# EAGLE board xmas (EAGLE 8.3.2)
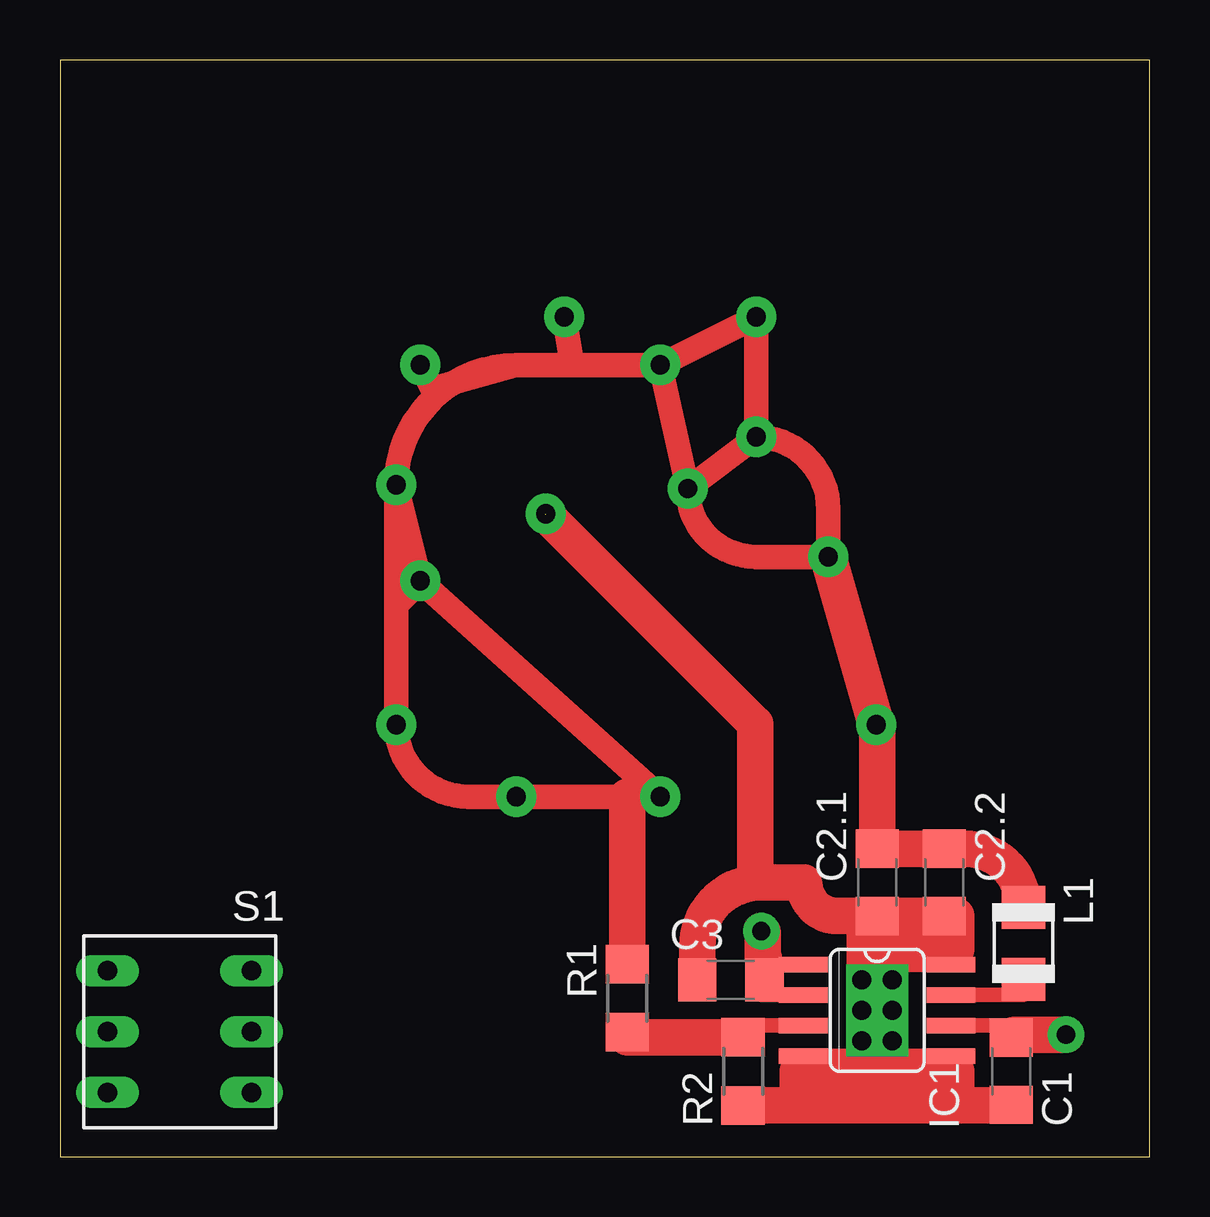
[diagram p0: board, top side]
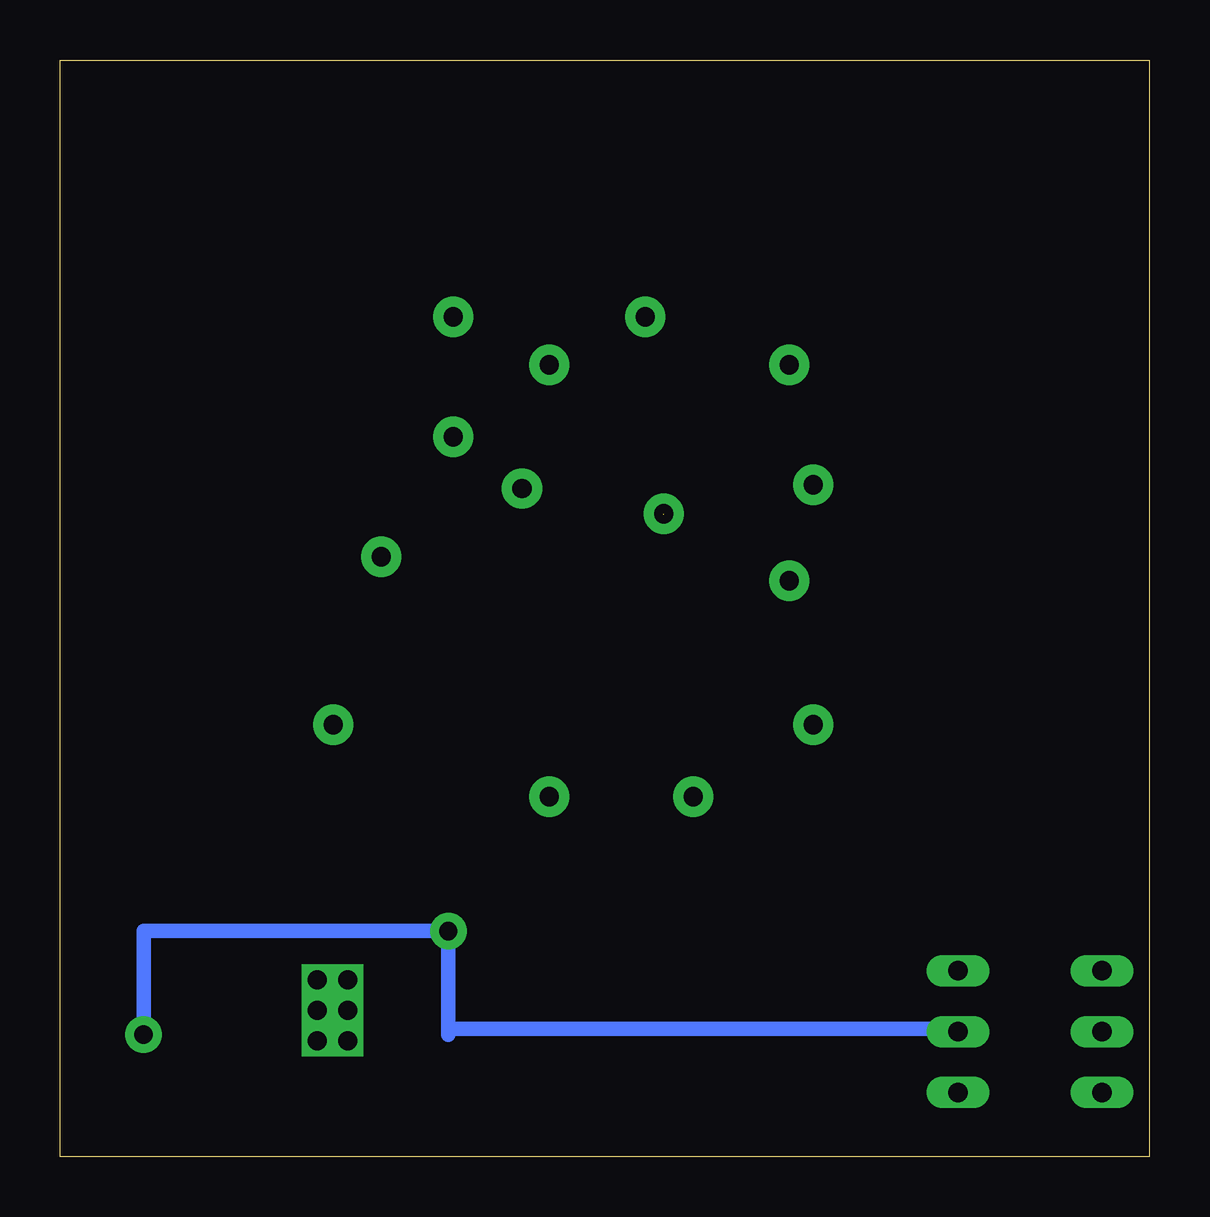
[diagram p1: board, bottom side, seen from below]

Size 45.39 x 45.71 mm. Coordinates in mm from the lower left corner, seen from the top.
Outline: 0,0 45.39,0 45.39,45.71 0,45.71 0,0
Copper layers (1*16): Top 0.035mm / dielectric 1.5mm / Bottom 0.035mm
Design rules "default": minimum track width 10mil, minimum drill 24mil, track to track 8mil, track to pad 8mil, pad to pad 8mil, via to via 8mil, smd to smd 8mil, copper to edge 40mil, drill to drill 8mil, minimum pad ring 10mil, minimum via ring 8mil, stop-mask expansion 4mil, vias tented up to drill 0mil, thermal gap 10mil

## Footprints (pad centres in the part's own frame; a part is rotated, then mirrored left to right if it is on the bottom)
C1206 = smd 1.6 x 1.8: 1 -1.4,0; 2 1.4,0
HSOP8 = smd 0.66 x 2.032: 1 -1.905,-3.073; 2 -0.635,-3.073; 3 0.635,-3.073; 4 1.905,-3.073; 5 1.905,3.073; 6 0.635,3.073; 7 -0.635,3.073; 8 -1.905,3.073 | drill 0.8 square: H@1 -1.27,-0.635; H@2 0,-0.635; H@3 1.27,-0.635; H@4 1.27,0.635; H@5 0,0.635; H@6 -1.27,0.635
L1210W = smd 1.8 x 1.8: 1 -1.499,0; 2 1.499,0
LSP08 = drill 0.8 pad 1.676: P$1 0,0
R1206 = smd 1.6 x 1.803: 1 -1.422,0; 2 1.422,0
9077-2 = drill 0.813 long: 1 -2.54,3; 2 0,3; 3 2.54,3; 4 -2.54,-3; 5 0,-3; 6 2.54,-3

## Placement (x,y rotation side)
C1  10μ  [C1206]  39.62,3.56 270 top
C2.1  22μ  [C1206]  34.04,11.43 270 top
C2.2  22μ  [C1206]  36.83,11.43 270 top
C3  0.1μ  [C1206]  27.94,7.37 180 top
IC1  ST1S10PHR  [HSOP8]  34.04,6.1 270 top
L1  2.2μ  [L1210W]  40.13,8.89 90 top
P1  LSP08  [LSP08]  14,18 0 top
P2  LSP08  [LSP08]  34,18 0 top
P3  LSP08  [LSP08]  14,28 0 top
P4  LSP08  [LSP08]  15,24 0 top
P5  LSP08  [LSP08]  25,15 0 top
P6  LSP08  [LSP08]  19,15 0 top
P7  LSP08  [LSP08]  29,35 0 top
P8  LSP08  [LSP08]  26.14,27.84 0 top
P9  LSP08  [LSP08]  25,33 0 top
P10  LSP08  [LSP08]  29,30 0 top
P11  LSP08  [LSP08]  21,35 0 top
P12  LSP08  [LSP08]  32,25 0 top
P13  LSP08  [LSP08]  15,33 0 top
PGND  LSP08  [LSP08]  20.23,26.79 0 top
R1  33k  [R1206]  23.62,6.6 90 top
R2  22k  [R1206]  28.45,3.56 90 top
S1  [9077-2]  4.97,5.21 270 top

## Library data of the parts
C1 C2.1 C2.2 C3 R1 R2 = resistor
IC1 = vreg-pulse
L1 = murata
P1-P13 PGND S1 = Gumix

## Nets
2.0V: C2.1.1 C2.2.1 L1.2 P1.P$1 P2.P$1 P3.P$1 P4.P$1 P5.P$1 P6.P$1 P7.P$1 P8.P$1 P9.P$1 P10.P$1 P11.P$1 P12.P$1 P13.P$1 R1.2
GND: C1.2 C2.1.2 C2.2.2 C3.2 IC1.4 IC1.5 IC1.8 IC1.H@1 PGND.P$1 R2.1
N$2: IC1.7 L1.1
N$3: IC1.3 R1.1 R2.2
V+: S1.3
V_IN: C1.1 C3.1 IC1.1 IC1.2 IC1.6 S1.2

## Tracks (layer width: path | path; a pad name or v marks a point on that pad's centre or on a via)
2.0V
  Top 0.813: P5.P$1 23.62,15 | P12.P$1 31,25
  Top 1.016: P9.P$1 P8.P$1 | P8.P$1 arc90 28.98,25 P12.P$1 32,27 arc90 P10.P$1 | P3.P$1 P4.P$1 | 19,33 arc90 P3.P$1 | 21.34,33 19,33 | 21.34,33 P9.P$1 | P3.P$1 14,23 | 14,23 P1.P$1 arc90 17,15 P6.P$1 P5.P$1 P4.P$1 | P4.P$1 14,23 | 21.34,33 P11.P$1 | P13.P$1 15.49,32 19,33 | P10.P$1 P7.P$1 P9.P$1 | P8.P$1 P10.P$1
  Top 1.524: P12.P$1 P2.P$1 34.04,18 C2.1.1 C2.2.1 37.69,12.83 arc-90 L1.2 | R1.2 23.62,15
GND  (1 unrouted)
  Top 0.61: 37.34,3.56 37.34,4.19 IC1.5 33.4,4.19 | 30.73,4.19 30.73,3.56 | 37.34,8.64 37.34,8 IC1.8 33.4,8 IC1.H@1 33.4,4.19 | 33.4,4.19 IC1.4
  Top 1.524: 30.73,2.13 R2.1 | 30.73,2.13 37.34,2.13 | 37.34,2.13 39.62,2.13 C1.2 | C2.1.2 C2.2.2 37.34,10.03 37.34,8.64 | 37.34,3.56 37.34,2.13 | 30.73,3.56 30.73,2.13 | 20.23,26.76 28.96,18.03 28.96,11.68 arc90 29.21,11.43 | 33.91,9.91 arc90 C2.1.2 | 29.21,11.43 30.99,11.43 arc90 32.39,10.03 C2.1.2 | C3.2 26.54,8.76 arc-90 29.21,11.43
N$2
  Top 0.61: IC1.7 40.13,6.73 L1.1
N$3
  Top 0.61: IC1.3 28.45,5.46 R2.2 28.35,5.08
  Top 1.524: R2.2 23.62,4.98 R1.1
V_IN  (via drill 0.76 pad 1.52)
  Top 0.61: IC1.1 29.21,8 C3.1 | IC1.2 29.21,6.73 C3.1 | IC1.6 39.12,5.46 C1.1 | C3.1 29.21,7.37
  Top 1.524: v29.21,9.4 29.26,9.35 29.26,8.3 29.34,8.22 C3.1 | v41.91,5.08 39.75,5.08 C1.1
  Bottom 0.61: v41.91,5.08 41.91,9.4 v29.21,9.4 29.21,5.33 | S1.2 7.97,5.33 15.24,5.33 29.21,5.33 | 29.21,5.33 29.21,5.08
(copper drawn outside any net)
  shapes: Top area x5